# Altium PCB beovox-poe.PcbDoc (part 2 of 3)
Units mm, origin at the board's own origin, x right, y up, seen from the top; angles counter-clockwise.
Board outline 92 x 70 mm, 4 copper layers (Top Layer, Layer 2, Layer 3, Bottom Layer), stack 1.576 mm thick; 96 components, 81 nets, 294 pads, 439 vias.
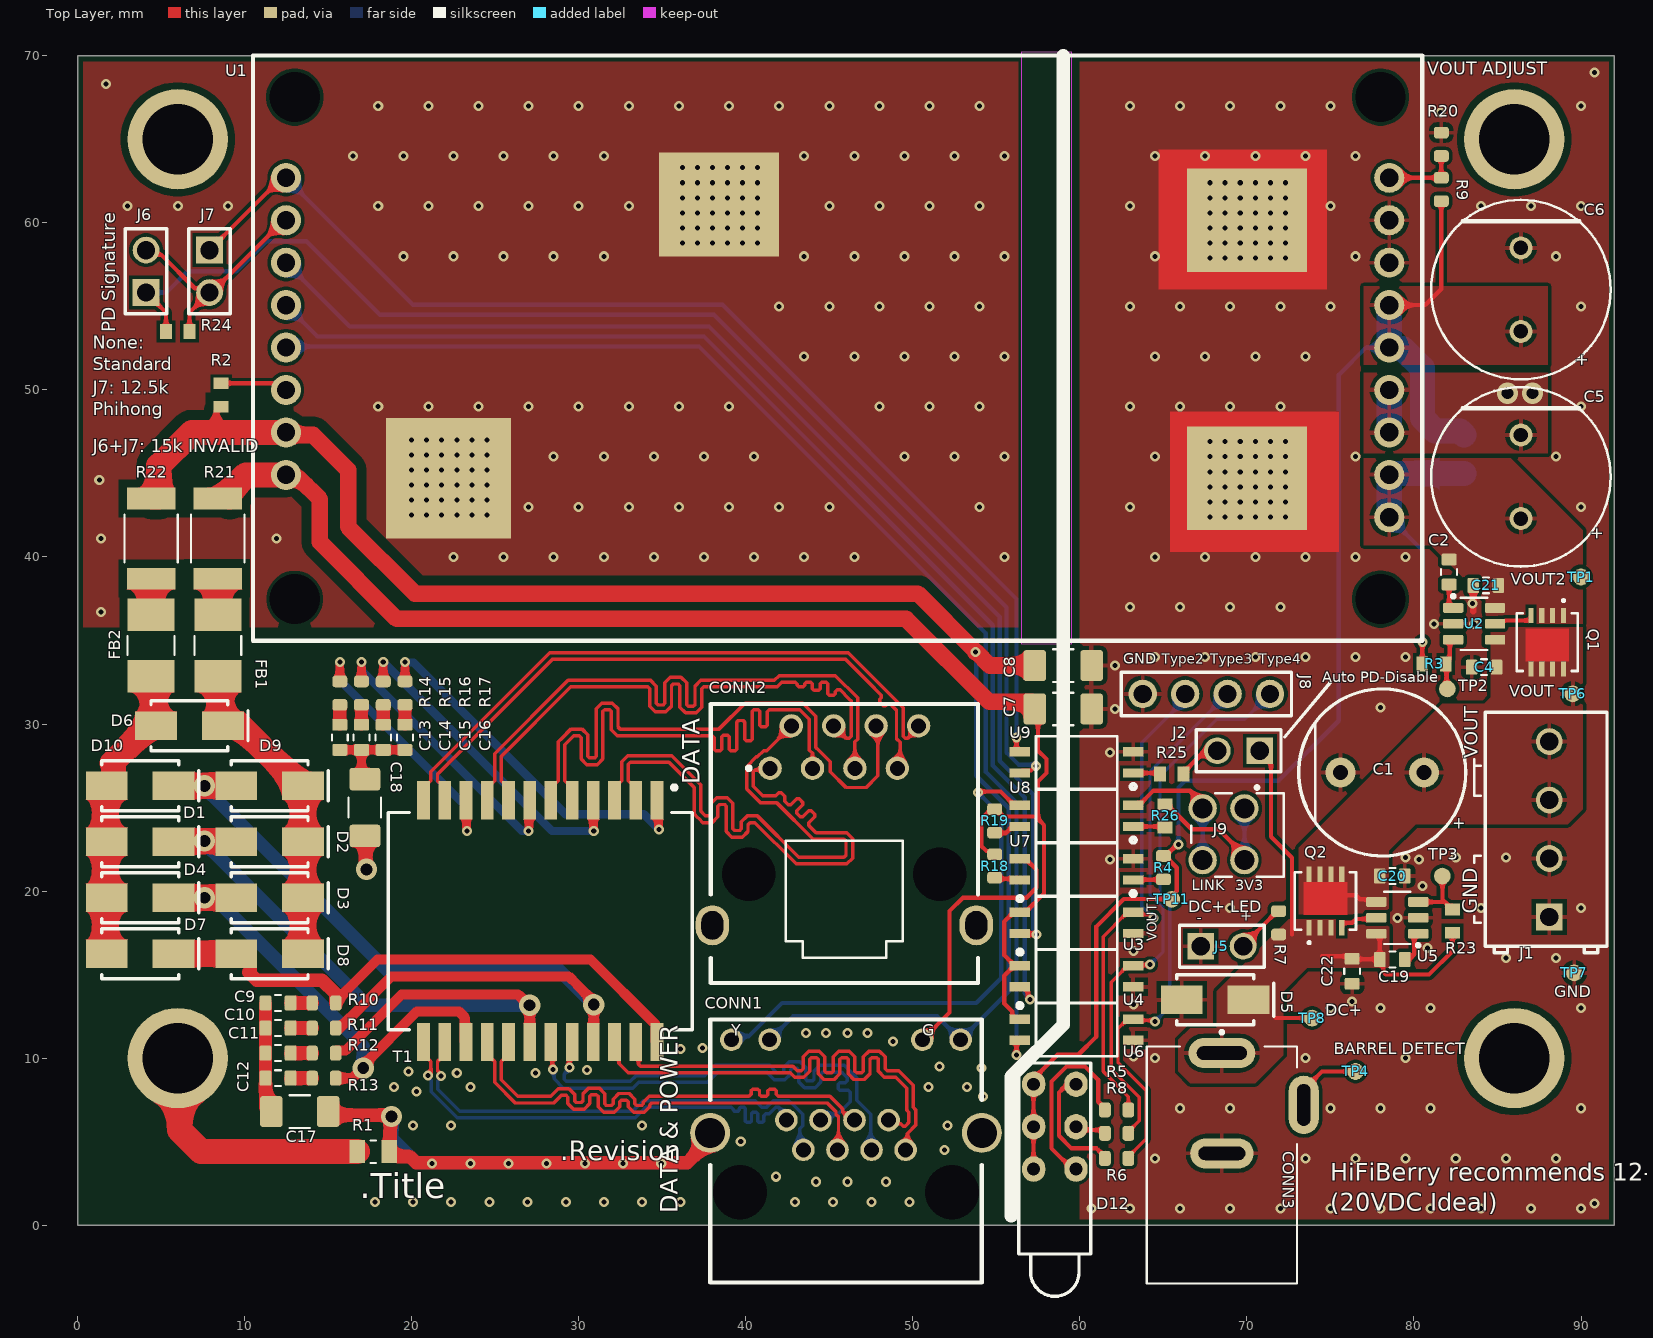
[diagram p0: Top Layer view]

## Part data (continued)
R4 R5 R6 R8 R25: library part "R0603 2K2 1% 100mW", "Res Thick Film 0603 2.2K Ohm 1% 0.1W(1/10W) ±100ppm/C Pad SMD T/R", Manufacturer="Royal Ohm", Manufacturer Part Number=0603WAF2201T5E, Resistance=2.2kΩ, Supplier Part Number=C4190, Supplier Part Number 1=303-0603WAF2201T5E, Category=Uncategorized, ComponentLink1Description=https://datasheet.octopart.com:443/0603WAF2201T5E-Royal-Ohm-datasheet-165785611.pdf?src-supplier=TME, ComponentLink1URL=https://datasheet.octopart.com:443/0603WAF2201T5E-Royal-Ohm-datasheet-165785611.pdf?src-supplier=TME, ComponentLink2Description=https://datasheet.octopart.com:443/0603WAF2201T5E-Royal-Ohm-datasheet-157855877.pdf?src-supplier=TME, ComponentLink2URL=https://datasheet.octopart.com:443/0603WAF2201T5E-Royal-Ohm-datasheet-157855877.pdf?src-supplier=TME, ComponentLink3Description=https://datasheet.octopart.com:443/0603WAF2201T5E-Royal-Ohm-datasheet-62069544.pdf?src-supplier=TME, ComponentLink3URL=https://datasheet.octopart.com:443/0603WAF2201T5E-Royal-Ohm-datasheet-62069544.pdf?src-supplier=TME, ComponentLink4Description=JLCPCB, ComponentLink4URL=https://jlcpcb.com/partdetail/4597-0603WAF2201T5E/C4190, Pricing 1="10000=0.001 (USD)", Stock 1=150000, Supplier=LCSC, Supplier 1=Mouser
R7 R18 R19 R24: library part "R0603 10K 1% 100mW JLC", "Res Thick Film 0603 10K Ohm 1% 0.1W(1/10W) ±100ppm/C Pad SMD", Manufacturer="Royal Ohm", Manufacturer Part Number=0603WAF1002T5E, Max Operating Temperature=155°C, Min Operating Temperature=-55°C, Power Dissipation=100mW, Resistance=10kΩ, Supplier Part Number=C25804, Supplier Part Number 1=303-0603WAF1002T5E, Temperature Coefficient=100ppm/°C, Tolerance=1%, Working Voltage=75V, Category="Chip SMD Resistors", China RoHS=Non-Compliant, ComponentLink1Description=https://datasheet.octopart.com:443/0603WAF1002T5E-Royal-Electronics-datasheet-181080982.pdf?src-supplier=IHS, ComponentLink1URL=https://datasheet.octopart.com:443/0603WAF1002T5E-Royal-Electronics-datasheet-181080982.pdf?src-supplier=IHS, ComponentLink2Description=https://datasheet.octopart.com:443/0603WAF1002T5E-Royal-Ohm-datasheet-165785611.pdf?src-supplier=TME, ComponentLink2URL=https://datasheet.octopart.com:443/0603WAF1002T5E-Royal-Ohm-datasheet-165785611.pdf?src-supplier=TME, ComponentLink3Description=https://datasheet.octopart.com:443/0603WAF1002T5E-Royal-Ohm-datasheet-157855877.pdf?src-supplier=TME, ComponentLink3URL=https://datasheet.octopart.com:443/0603WAF1002T5E-Royal-Ohm-datasheet-157855877.pdf?src-supplier=TME, ComponentLink4Description=https://datasheet.octopart.com:443/0603WAF1002T5E-Royal-Ohm-datasheet-62069544.pdf?src-supplier=TME, ComponentLink4URL=https://datasheet.octopart.com:443/0603WAF1002T5E-Royal-Ohm-datasheet-62069544.pdf?src-supplier=TME, ComponentLink5Description=JLCPCB, ComponentLink5URL=https://jlcpcb.com/partdetail/26547-0603WAF1002T5E/C25804, Country of Origin=Thailand, Export Control Classification Number (ECCN) Code=EAR99, Harmonized Tariff Schedule (HTS) Code=8533.21.00.30, Height=450µm, Introduction Date=2006-01-09, Length=1.6mm, Lifecycle Status=Production, Mount="Surface Mount", Number of Terminals=2, Pricing 1="10000=0.001 (USD)", REACH SVHC=Yes, RoHS=Compliant, Stock 1=225000, Supplier=LCSC, Supplier 1=Mouser, Width=800µm
R9: library part RC0603FR-0791KL, "SMD Chip Resistor, 91 kOhm, ± 1%, 100 mW, 0603 [1608 Metric], Thick Film, General Purpose", Case Code (Imperial)=0603, Case Code (Metric)=1608, Manufacturer=Yageo, Max Operating Temperature=155°C, Max Power Dissipation=100mW, Min Operating Temperature=-55°C, Resistance=91kR, Supplier Part Number=C137671, Supplier Part Number 1=1365832, Temperature Coefficient=100ppm/°C, Tolerance=1%, Voltage Rating=75V, Voltage Rating (DC)=50V, Case/Package=0603, Category="Chip SMD Resistors", ComponentLink1Description=https://datasheet.ciiva.com/11819/0900766b80c66297-11819716.pdf?src-supplier=Rs, ComponentLink1URL=https://datasheet.ciiva.com/11819/0900766b80c66297-11819716.pdf?src-supplier=Rs, ComponentLink2Description=https://datasheet.ciiva.com/15189/getdatasheetpartid-326529-15189837.pdf?src-supplier=Verical, ComponentLink2URL=https://datasheet.ciiva.com/15189/getdatasheetpartid-326529-15189837.pdf?src-supplier=Verical, ComponentLink3Description=LCSC, ComponentLink3URL=https://www.lcsc.com/product-detail/Chip-Resistor-Surface-Mount_YAGEO-RC0603FR-0791KL_C137671.html, Construction=Rectangular, Depth=0.8mm, Features="Moisture Resistant", Height=0.45mm, Lead Free="Lead Free", Length=1.6mm, Manufacturer Part Number=RC0603FR-0791KL, Military Standard=Not, Mount="Surface Mount", Number of Terminations=2, Packaging="Tape and Reel", Power Rating=100mW, Pricing 1="5000=0.0013, 50000=0.0013, 150000=0.0012, 375000=0.0012, 1000000=0.0011 (USD)", RoHS=Yes, RoHS Compliant=Yes, Series=RC, Size Code=0603, Stock 1=250000, Supplier=LCSC, Supplier 1="Future Electronics", Technology="THICK FILM", Termination=SMD/SMT, Weight=7.1E-05oz, Width=0.8mm
R10 R11 R12 R13 R14 R15 R16 R17: library part RC0603FR-0775RL, "SMD Chip Resistor, 75 Ohm, ± 1%, 100 mW, 0603 [1608 Metric], Thick Film, General Purpose", Case Code (Imperial)=0603, Case Code (Metric)=1608, Manufacturer=Yageo, Max Operating Temperature=155°C, Max Power Dissipation=100mW, Min Operating Temperature=-55°C, Package Quantity=1, Resistance=75R, Resistance Tolerance=1%, Resistor Type="Thick Film", Supplier Part Number=C112309, Supplier Part Number 1=4693131, Temperature Coefficient=100ppm/°C, Voltage Rating=50V, Case/Package=0603, Category="Chip SMD Resistors", ComponentLink1Description=https://datasheet.ciiva.com/11819/0900766b80f96399-11819407.pdf?src-supplier=Rs, ComponentLink1URL=https://datasheet.ciiva.com/11819/0900766b80f96399-11819407.pdf?src-supplier=Rs, ComponentLink2Description=https://datasheet.ciiva.com/46395/443971-46395018.pdf?src-supplier=Element14, ComponentLink2URL=https://datasheet.ciiva.com/46395/443971-46395018.pdf?src-supplier=Element14, ComponentLink3Description=https://datasheet.ciiva.com/2453/pyu-r-int-thick-7-2453962.pdf?src-supplier=Digi-Key, ComponentLink3URL=https://datasheet.ciiva.com/2453/pyu-r-int-thick-7-2453962.pdf?src-supplier=Digi-Key, ComponentLink4Description=https://datasheet.ciiva.com/2453/pyu-r-int-thick-7-2453963.pdf?src-supplier=Digi-Key, ComponentLink4URL=https://datasheet.ciiva.com/2453/pyu-r-int-thick-7-2453963.pdf?src-supplier=Digi-Key, ComponentLink5Description=https://datasheet.ciiva.com/2453/pyu-r-int-thick-7-2453961.pdf?src-supplier=Digi-Key, ComponentLink5URL=https://datasheet.ciiva.com/2453/pyu-r-int-thick-7-2453961.pdf?src-supplier=Digi-Key, ComponentLink6Description=LCSC, ComponentLink6URL=https://www.lcsc.com/product-detail/Chip-Resistor-Surface-Mount_YAGEO-RC0603FR-0775RL_C112309.html, Construction=Rectangular, Depth=0.8mm, Features="Moisture Resistant", Height=0.022inch, Lead Free=5697LeadFree, Length=0.063inch, Manufacturer Part Number=RC0603FR-0775RL, Military Standard=Not, Number of Terminations=2, Packaging="Tape and Reel", Power Rating=100mW, Pricing 1="5000=0.0014, 50000=0.0013, 200000=0.0012, 625000=0.0012, 2000000=0.0011 (USD)", Reach SVHC Compliant=No, RoHS=Yes, RoHS Compliant=Yes, Series=RC, Size Code=0603, Stock 1=775000, Supplier=LCSC, Supplier 1="Future Electronics", Technology="THICK FILM", Termination=SMD/SMT, Tolerance=1%, Voltage Rating (DC)=50V, Width=0.031inch
R20: library part RC0603FR-078K2L, "Res Thick Film 0603 8.2K Ohm 1% 0.1W(1/10W) ±100ppm/C Pad SMD T/R", Case Code (Imperial)=0603, Case Code (Metric)=1608, Manufacturer=Yageo, Max Operating Temperature=155°C, Max Power Dissipation=100mW, Min Operating Temperature=-55°C, Package Quantity=1, Resistance=8.2kR, Resistance Tolerance=1%, Resistor Type="Thick Film", Supplier Part Number=C114637, Supplier Part Number 1=9121856, Temperature Coefficient=100ppm/°C, Voltage Rating=50V, Case/Package=0603, Category="Chip SMD Resistors", ComponentLink1Description=https://datasheet.ciiva.com/11808/0900766b80f96399-11808128.pdf?src-supplier=Rs, ComponentLink1URL=https://datasheet.ciiva.com/11808/0900766b80f96399-11808128.pdf?src-supplier=Rs, ComponentLink2Description=https://datasheet.ciiva.com/7746/443971-7746409.pdf?src-supplier=Element14, ComponentLink2URL=https://datasheet.ciiva.com/7746/443971-7746409.pdf?src-supplier=Element14, ComponentLink3Description=https://datasheet.ciiva.com/7746/443971-7746408.pdf?src-supplier=Element14, ComponentLink3URL=https://datasheet.ciiva.com/7746/443971-7746408.pdf?src-supplier=Element14, ComponentLink4Description=https://datasheet.ciiva.com/7660/38590-7660795.pdf?src-supplier=Element14, ComponentLink4URL=https://datasheet.ciiva.com/7660/38590-7660795.pdf?src-supplier=Element14, ComponentLink5Description=https://datasheet.ciiva.com/46412/443971-46412857.pdf?src-supplier=Element14, ComponentLink5URL=https://datasheet.ciiva.com/46412/443971-46412857.pdf?src-supplier=Element14, ComponentLink6Description=https://datasheet.ciiva.com/2454/pyu-r-int-thick-7-2454253.pdf?src-supplier=Digikey, ComponentLink6URL=https://datasheet.ciiva.com/2454/pyu-r-int-thick-7-2454253.pdf?src-supplier=Digikey, ComponentLink7Description=https://datasheet.ciiva.com/2454/pyu-r-int-thick-7-2454254.pdf?src-supplier=Digikey, ComponentLink7URL=https://datasheet.ciiva.com/2454/pyu-r-int-thick-7-2454254.pdf?src-supplier=Digikey, ComponentLink8Description=https://datasheet.ciiva.com/2454/pyu-r-int-thick-7-2454252.pdf?src-supplier=Digikey, ComponentLink8URL=https://datasheet.ciiva.com/2454/pyu-r-int-thick-7-2454252.pdf?src-supplier=Digikey, ComponentLink9Description=LCSC, ComponentLink9URL=https://www.lcsc.com/product-detail/Chip-Resistor-Surface-Mount_YAGEO-RC0603FR-078K2L_C114637.html, Depth=0.8mm, Features="Moisture Resistant", Height=0.022inch, Lead Free=5697LeadFree, Lead Pitch=0.3mm, Length=0.063inch, Manufacturer Part Number=RC0603FR-078K2L, Number of Pins=2, Number of Terminations=2, Packaging="Tape and Reel", Power Rating=100mW, Pricing 1="5000=0.0015, 50000=0.0014, 150000=0.0014, 375000=0.0013, 1000000=0.0012 (USD)", Reach SVHC Compliant=No, RoHS=Yes, RoHS Compliant=Yes, Series=RC, Size Code=0603, Stock 1=690000, Supplier=LCSC, Supplier 1="Future Electronics", Technology="THICK FILM", Termination=SMD/SMT, Tolerance=1%, Voltage Rating (AC)=50V, Voltage Rating (DC)=50V, Width=0.031inch
R21 R22: library part "R1812 0R 1% 750mW", "-55℃~+155℃ 0Ω 1W 200V Thick Film Resistor ±5% 1812 Chip Resistor - Surface Mount ROHS", Manufacturer=FOJAN, Manufacturer Part Number=FRC1812F0000TS, Supplier Part Number=C2999613, ComponentLink1Description=JLCPCB, ComponentLink1URL=https://jlcpcb.com/partdetail/FOJAN-FRC1812F0000TS/C2999613, Supplier=LCSC
R26: library part "R0603 330R 1% 100mW", "Fixed Resistor, Metal Glaze/thick Film, 0.1W, 330ohm, 75V, 1% +/-Tol, 100ppm/Cel, Surface Mount, 0603", Manufacturer="Royal Ohm", Manufacturer Part Number=0603WAF3300T5E, Max Operating Temperature=155°C, Min Operating Temperature=-55°C, Power Dissipation=100mW, Resistance=330Ω, Supplier Part Number=C23138, Supplier Part Number 1=303-0603WAF3300T5E, Temperature Coefficient=100ppm/°C, Tolerance=1%, Working Voltage=75V, Category="Chip SMD Resistors", China RoHS=Non-Compliant, ComponentLink1Description=https://datasheet.octopart.com:443/0603WAF3300T5E-Royal-Ohm-datasheet-157855877.pdf?src-supplier=IHS, ComponentLink1URL=https://datasheet.octopart.com:443/0603WAF3300T5E-Royal-Ohm-datasheet-157855877.pdf?src-supplier=IHS, ComponentLink2Description=https://datasheet.octopart.com:443/0603WAF3300T5E-Royal-Ohm-datasheet-165785611.pdf?src-supplier=TME, ComponentLink2URL=https://datasheet.octopart.com:443/0603WAF3300T5E-Royal-Ohm-datasheet-165785611.pdf?src-supplier=TME, ComponentLink3Description=https://datasheet.octopart.com:443/0603WAF3300T5E-Royal-Ohm-datasheet-62069544.pdf?src-supplier=TME, ComponentLink3URL=https://datasheet.octopart.com:443/0603WAF3300T5E-Royal-Ohm-datasheet-62069544.pdf?src-supplier=TME, ComponentLink4Description=JLCPCB, ComponentLink4URL=https://jlcpcb.com/partdetail/23865-0603WAF3300T5E/C23138, Country of Origin=Thailand, Export Control Classification Number (ECCN) Code=EAR99, Harmonized Tariff Schedule (HTS) Code=8533.21.00.30, Introduction Date=2016-08-18, Lifecycle Status=Production, Mount="Surface Mount", Number of Terminals=2, Pricing 1="10000=0.001 (USD)", REACH SVHC=Yes, RoHS=Compliant, Supplier=LCSC, Supplier 1=Mouser
T1: "LAN Transformer 1:1 Surface Mount IEEE 802.3bt", Inductance=.35uH, Manufacturer=E-NETTR, ComponentLink1Description=LCSC, ComponentLink1URL=https://www.lcsc.com/product-detail/C4154999.html?s_z=n_H2415G, ComponentLink2Description=JLCPCB, ComponentLink2URL=https://jlcpcb.com/partdetail/ENETTR-H2415G/C4154999, Manufacturer Part Number=H2415G, Rate="100/1000 Base-T", Supplier=LCSC, Supplier Part Number=H2415G
TP1 TP2 TP3 TP4 TP6 TP7 TP8 TP11: library part Test_Point
U1: "IEEE802.3bt 4-Pair PD Module - works with AG6800", Manufacturer=Silvertel, Supplier Part Number 1=5061-AG5800-ND, Manufacturer Part Number=AG5800, Pricing 1="1=25.36, 10=24.65, 24=23.92, 48=23.2, 120=22.47, 264=22.00008 (USD)", RoHS=No, Stock 1=862, Supplier 1=Digi-Key
U2 U5: "Low IQ Reverse Battery Protection Ideal Diode Controller 3.2V to 65V 6-Pin SOT-23 T/R", Case/Package=SOT-23-6, Manufacturer="Texas Instruments", Max Operating Temperature=125°C, Max Output current=5A, Min Operating Temperature=-40°C, Supplier Part Number=C2653623, Supplier Part Number 1=595-LM74700QDBVTQ1, Category="Power Management ICs", ComponentLink1Description=http://www.ti.com/general/docs/suppproductinfo.tsp?distId=10&amp;gotoUrl=http%3A%2F%2Fwww.ti.com%2Flit%2Fgpn%2Flm74700-q1&src-supplier=Digi-Key, ComponentLink1URL=http://www.ti.com/general/docs/suppproductinfo.tsp?distId=10&amp;gotoUrl=http%3A%2F%2Fwww.ti.com%2Flit%2Fgpn%2Flm74700-q1&src-supplier=Digi-Key, ComponentLink2Description=LCSC, ComponentLink2URL=https://www.lcsc.com/product-detail/Power-Distribution-Switches_Texas-Instruments-LM74700QDBVTQ1_C2653623.html, Manufacturer Part Number=LM74700QDBVTQ1, Mount="Surface Mount", Packaging="Cut Tape", Pricing 1="1=2.39, 10=2.15, 25=2.03, 50=2.03, 100=1.73, 250=1.62, 500=1.41, 1000=1.17, 2500=1.1, 5000=1.07, 10000=1.07 (USD)", RoHS=Yes, RoHS Compliant=Yes, Series="Automotive, AEC-Q100", Stock 1=3771, Supplier=LCSC, Supplier 1=Mouser, Turn-Off Delay Time=450ns, Turn-On Delay Time=1.4us
U3 U4 U6 U7 U8 U9: "80V 3750V 50mA 0.4V@2.4mA,8mA 1 6V 1.2V DC SOP-4-1.27mm Optocouplers - Phototransistor Output ROHS", Manufacturer=Orient, Supplier Part Number=C282477, ComponentLink1Description=LCSC, ComponentLink1URL=https://www.lcsc.com/product-detail/Optocouplers-Phototransistor-Output_Orient-OR-3H7B-TP-G_C282477.html, Manufacturer Part Number=OR-3H7B-TP-G, Supplier=LCSC

## Via types
v1: diameter 0.6, hole 0.3, Top Layer to Bottom Layer, tented both sides, 281 vias
v2: diameter 0.61, hole 0.3, Top Layer to Bottom Layer, 144 vias
v3: diameter 1.27, hole 0.711, Top Layer to Bottom Layer, tented both sides, 5 vias
v4: diameter 0.6, hole 0.3, Top Layer to Bottom Layer, 4 vias
v5: diameter 1.27, hole 0.711, Top Layer to Bottom Layer, 3 vias
v6: diameter 1.27, hole 0.711, Top Layer to Bottom Layer, tented top, 2 vias

## Nets (pads, with @x,y where several pads share a name; then routed paths per layer and width w, separated by ;. In a path a pad name is that pad's centre, name@x,y a point inside that pad or via, vN(x,y) a via of type N, cw(c..) or ccw(c..) an arc to the next point about the centre after c; other vN are vias at no path point)
0V2: C5.N J3.3 J4.1 U1.11 U1.12 | length 2.5
  Bottom Layer w1.5: U1.11@78.52,47.455 U1.12@78.52,49.995
  other v3: 85.6,49.8 87.1,49.8
ADJ: R9.2 R20.2 U1.17 | length 4.4
  Top Layer w0.254: U1.17@78.52,62.695 78.525,62.7 R9.2@81.633,62.7 R20.2@81.633,64
CGND: C17.1 C18.1 CONN1.S1 CONN1.S2 CONN2.S1 CONN2.S2 R1.2 | length 50.4
  Top Layer w0.8: C17.1@15,6.8 15.21,6.59 18.71,6.59 v5(18.8,6.5) 18.715,6.415 R1.2@18.715,4.69 ; C18.1@17.2,23.3 17.25,23.25 17.25,21.35 v5(17.3,21.3) ; R1.2@18.655,4.4 18.655,4.17 18.715,4.11 19.89,4.11 20.27,3.73 21.153,3.73 23.439,3.73 25.725,3.73 28.011,3.73 30.297,3.73 32.583,3.73 34.869,3.73 36.503,3.73 37.87,5.097 CONN1.S2@37.87,5.53
  Bottom Layer w0.8: v5(18.8,6.5) 18.825,6.475 18.825,5.175 20.27,3.73 23.439,3.73 25.725,3.73 28.011,3.73 30.297,3.73 32.583,3.73 36.503,3.73 37.87,5.097 CONN1.S2@37.87,5.53
  other v1: 17.796,1.4 20.082,1.4 22.368,1.4 24.654,1.4 26.94,1.4 29.226,1.4 31.512,1.4 33.798,1.4 36.084,1.4 42.942,1.4 45.228,1.4 47.514,1.4 49.8,1.4 44.2,2.6 46.1,2.6 48.4,2.6 41.8,2.9 21.225,3.686 23.511,3.686 25.797,3.686 28.083,3.686 30.369,3.686 32.655,3.686 34.941,3.686 51.9,4.5 39.7,5 20.082,5.972 22.368,5.972 33.798,5.972 52.086,5.972 54.2,7.7 20.3,8 18.939,8.258 23.511,8.258 50.943,8.258 53.229,8.258 22.7,9.1 27.4,9.1 19.8,9.2 30.5,9.3 54.1,9.4 51.6,9.5 36.084,10.544 37.4,10.6 48.8,11 43.6,11.5 44.8,11.5 46.1,11.5 47.3,11.5
DC+: C19.2 C22.2 CONN3.1 D5.2 J2.1 Q2.1 Q2.2 Q2.3 R7.1 R23.2 TP8.1 U5.6 | length 25.4
  Top Layer w0.254: J2.1@70.77,28.4 71.443,27.727 71.443,23.255 72.7,21.998 72.7,17.4 ; 71.724,12.4 TP8.1@73.9,12.4 ; 74.5,16.1 76.15,16.1 C22.2@76.3,15.95 ; C22.2@76.5,16 76.575,15.925 77.925,15.925 C19.2@77.95,15.9 77.95,17.287 77.787,17.45 U5.6@77.745,17.45 ; C19.2@78.096,15.645 78.165,15.577 78.165,15.149 78.314,15 80.9,15 82.3,16.4 R23.2@82.3,17.5
GND: C1.N C4.1 C6.N C7.2 C8.2 C20.1 C21.1 C22.1 CONN3.2 D5.1 J1.1 J1.2 J4.2 J5.1 J8.4 R20.1 TP7.1 U1.15 U1.16 U1.19 U2.2 U3.3 U4.3 U5.2 U6.3 U7.2 U9.2 | length 1.5
  Top Layer w0.4: 83.55,36.761 C21.1@83.55,38.3
  other v1: 60.7,1 63,1 66,1 69,1 72,1 75,1 78,1 81,1 84,1 87,1 90,1 90.8,1.3 64.5,4 73.5,4 76.5,4 79.5,4 82.5,4 85.5,4 88.5,4 66,7 69,7 75,7 78,7 81,7 90,7 64.5,10 73.5,10 79.5,10 63.2,10.1 75,13 78,13 81,13 90,13 63.2,13.2 76.3,13.4 85.5,16 88.5,16 63.2,16.4 80.8,16.6 79,18.4 69,19 84,19 90,19 80.5,20.3 61.8,21.9 80.3,21.9 79.5,22 82.5,22 85.5,22 61.8,28.3 62.1,30.9 78,31 62.1,33.5 64.5,34 67.5,34 70.5,34 73.5,34 76.5,34 79.5,34 81.2,36 83.6,36 63,37 66,37 69,37 72,37 83.5,37.2 64.5,40 67.5,40 70.5,40 73.5,40 76.5,40 79.5,40 63,43 90,43 64.5,46 76.5,46 88.5,46 63,49 66,49 69,49 72,49 90,49 64.5,52 67.5,52 70.5,52 73.5,52 63,55 66,55 69,55 72,55 75,55 90,55 64.5,58 76.5,58 88.5,58 63,61 75,61 84,61 87,61 90,61 64.5,64 67.5,64 70.5,64 73.5,64 76.5,64 81.6,66.6 63,67 66,67 69,67 72,67 75,67 90,67 90.8,69
  other v2: 67.8,42.4 68.7,42.4 69.6,42.4 70.5,42.4 71.4,42.4 72.3,42.4 67.8,43.3 68.7,43.3 69.6,43.3 70.5,43.3 71.4,43.3 72.3,43.3 67.8,44.2 68.7,44.2 69.6,44.2 70.5,44.2 71.4,44.2 72.3,44.2 67.8,45.1 68.7,45.1 69.6,45.1 70.5,45.1 71.4,45.1 72.3,45.1 67.8,46 68.7,46 69.6,46 70.5,46 71.4,46 72.3,46 67.8,46.9 68.7,46.9 69.6,46.9 70.5,46.9 71.4,46.9 72.3,46.9 67.8,57.9 68.7,57.9 69.6,57.9 70.5,57.9 71.4,57.9 72.3,57.9 67.8,58.8 68.7,58.8 69.6,58.8 70.5,58.8 71.4,58.8 72.3,58.8 67.8,59.7 68.7,59.7 69.6,59.7 70.5,59.7 71.4,59.7 72.3,59.7 67.8,60.6 68.7,60.6 69.6,60.6 70.5,60.6 71.4,60.6 72.3,60.6 67.8,61.5 68.7,61.5 69.6,61.5 70.5,61.5 71.4,61.5 72.3,61.5 67.8,62.4 68.7,62.4 69.6,62.4 70.5,62.4 71.4,62.4 72.3,62.4
LINK_LED: J9.2 U8.2 | length 8.2
  Top Layer w0.254: U8.2@63.191,25.135 63.521,25.135 64.386,26 66.609,26 67.35,25.259 J9.2@67.35,24.95
  Bottom Layer w0.254: J9.2@67.35,21.85 J9.2@67.35,24.95
LINK_LED_ISO: CONN1.12 U8.3 | length 32.2
  Top Layer w0.254: v1(53.9,25.9) 53.966,25.966 55.248,25.966 56.079,25.135 U8.3@56.409,25.135
  Bottom Layer w0.254: CONN1.12@39.14,11.1 39.359,11.319 40.197,11.319 42.178,13.3 53.8,13.3 55.292,14.792 55.292,24.508 v1@53.908,25.892
NetC2_1: C2.1 U2.1 | length 2
  Top Layer w0.254: U2.1@82.345,36.95 82.263,36.95 82.1,37.113 82.1,38.127 82.077,38.15 81.9,38.15 C2.1@81.988,38.238 ; C2.1@81.988,38.238 C2.1@82.1,38.35 C2.1@81.988,38.238
NetC9_1: C9.1 C10.1 C11.1 C12.1 C17.2 | length 6.7
  Top Layer w0.8: C9.1@11.25,13.3 C10.1@11.25,11.8 C11.1@11.25,10.3 11.25,7.063 11.337,7.063 C17.2@11.6,6.8
NetC9_2: C9.2 R10.1 | length 1.3
  Top Layer w0.8: C9.2@12.75,13.3 R10.1@14.05,13.3
NetC10_2: C10.2 R11.1 | length 1.3
  Top Layer w0.8: C10.2@12.75,11.8 R11.1@14.05,11.8
NetC11_2: C11.2 R12.1 | length 1.3
  Top Layer w0.8: C11.2@12.75,10.3 R12.1@14.05,10.3